# EAGLE board 7-segment_mega (EAGLE 6.2)
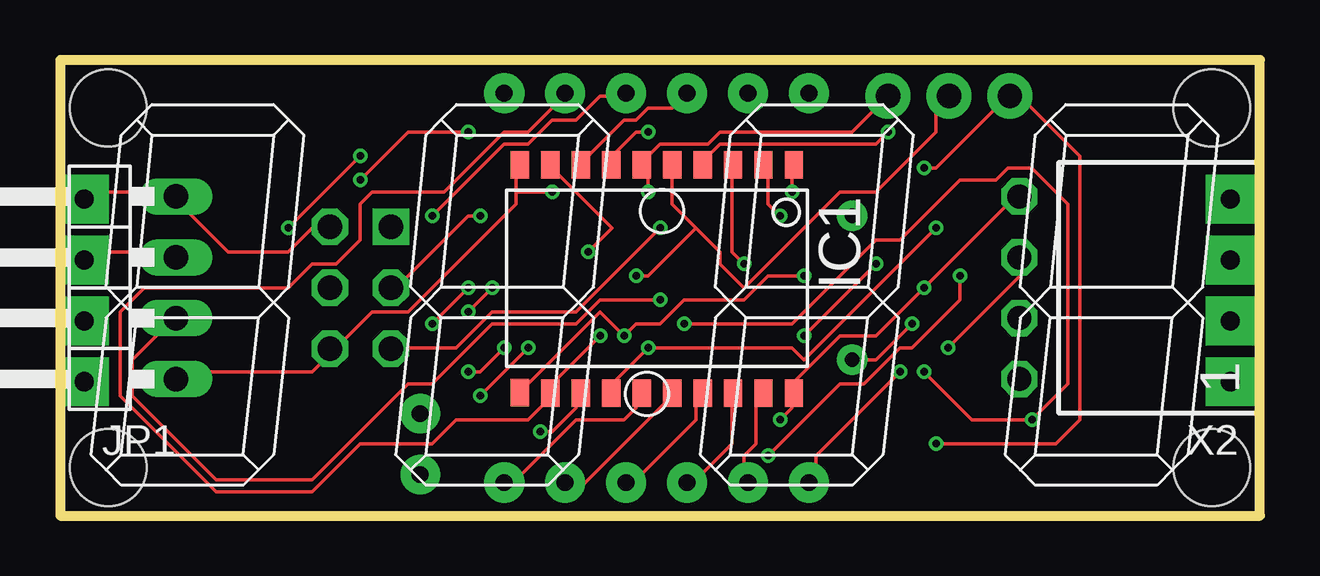
[diagram p0: board, top side]
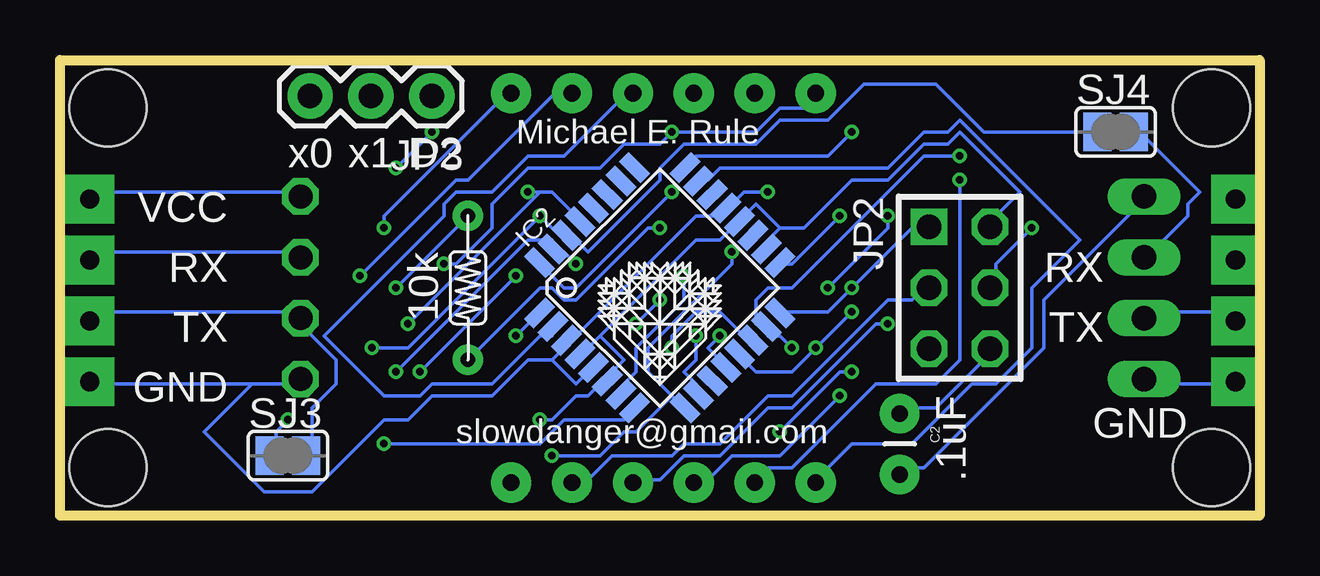
[diagram p1: board, bottom side, seen from below]

Size 50 x 19 mm. Coordinates in mm from the lower left corner, seen from the top.
Outline: 0,0 50,0 50,19 0,19 0,0
Copper layers (1*16): Top 0.035mm / dielectric 1.5mm / Bottom 0.035mm
Design rules: minimum track width 6mil, minimum drill 12mil, track to track 6mil, track to pad 6mil, pad to pad 6mil, via to via 6mil, smd to smd 0mil, copper to edge 10mil, drill to drill 10mil, minimum pad ring 10mil, minimum via ring 6mil, stop-mask expansion 2mil, vias tented up to drill 100mil, thermal gap 10mil
Holes 3.2 mm at 2,17 2,2 48,17 48,2

## Footprints (pad centres in the part's own frame; a part is rotated, then mirrored left to right if it is on the bottom)
CAP-PTH-SMALL = drill 0.7 pad 1.651: 1 0,0; 2 2.54,0
SO20L = smd 0.762 x 1.143: 1 -5.08,-5.131; 2 -3.81,-5.131; 3 -2.54,-5.131; 4 -1.27,-5.131; 5 0,-5.131; 6 1.27,-5.131; 7 2.54,-5.131; 8 3.81,-5.131; 9 5.08,-5.131; 10 6.35,-5.131; 11 6.35,4.369; 12 5.08,4.394; 13 3.81,4.394; 14 2.54,4.394; 15 1.27,4.394; 16 0,4.394; 17 -1.27,4.394; 18 -2.54,4.394; 19 -3.81,4.394; 20 -5.08,4.394
TQFP32-08 = smd 1.27 x 0.559: 1 -4.293,2.8; 2 -4.293,2; 3 -4.293,1.2; 4 -4.293,0.4; 5 -4.293,-0.4; 6 -4.293,-1.2; 7 -4.293,-2; 8 -4.293,-2.8; 17 4.293,-2.8; 18 4.293,-2; 19 4.293,-1.2; 20 4.293,-0.4; 21 4.293,0.4; 22 4.293,1.2; 23 4.293,2; 24 4.293,2.8 | smd 0.559 x 1.27: 9 -2.8,-4.293; 10 -2,-4.293; 11 -1.2,-4.293; 12 -0.4,-4.293; 13 0.4,-4.293; 14 1.2,-4.293; 15 2,-4.293; 16 2.8,-4.293; 25 2.8,4.293; 26 2,4.293; 27 1.2,4.293; 28 0.4,4.293; 29 -0.4,4.293; 30 -1.2,4.293; 31 -2,4.293; 32 -2.8,4.293
1X04/90 = drill 1.016 long: 1 -3.81,-3.81; 2 -1.27,-3.81; 3 1.27,-3.81; 4 3.81,-3.81
AVR-ISP-6 = drill 1.016 square: 1 -2.54,-1.27 | drill 1.016 octagon: 2 -2.54,1.27; 3 0,-1.27; 4 0,1.27; 5 2.54,-1.27; 6 2.54,1.27
1X03 = drill 1.016 pad 1.88: 1 0,0; 2 2.54,0; 3 5.08,0
SJ = smd 1.168 x 1.6: 1 -0.762,0; 2 0.762,0
7SEG_5462BS = drill 0.7 pad 1.676: A0 18.5,17.615; A1 26.12,17.615; A2 28.66,17.615; A3 31.2,1.375; C0 21.04,17.615; C1 23.58,17.615; C2 31.2,17.615; C3 28.66,1.375; C4 18.5,1.375; C5 26.12,1.375; C6 21.04,1.375; C7 23.58,1.375
R-6 = drill 0.6 pad 1.27: P$1 -3,0; P$2 3,0
WIREPAD_SQUARE_1 = drill 0.8 pad 2.032 square: P$1 0,0
SSW-104-02-S-S-RA = drill 1 pad 1.5 octagon: 1 -3.81,1.524; 2 -1.27,1.524; 3 1.27,1.524; 4 3.81,1.524

## Placement (x,y rotation side)
C2  [CAP-PTH-SMALL]  15,4.25 270 bottom
IC1  AT90S2313S  [SO20L]  25.5,9.5 180 top
IC2  MEGA8-AI  [TQFP32-08]  25,9.5 45 bottom
JP1  [1X04/90]  1,9.5 90 top
JP2  AVR-ISP-6  [AVR-ISP-6]  12.5,9.5 270 bottom
JP3  [1X03]  34.5,17.5 180 bottom
SJ3  [SJ]  40.5,2.5 0 bottom
SJ4  [SJ]  6,16 0 bottom
U$1  7-SEGMENT-DISPLAY-5462-BS  [7SEG_5462BS]  0,0 0 top
U$2  R-6  [R-6]  33,9.5 90 bottom
U$3  WIREPAD_SQUARE_1  [WIREPAD_SQUARE_1]  48.76,5.58 0 top
U$4  WIREPAD_SQUARE_1  [WIREPAD_SQUARE_1]  1,8.12 0 top
U$5  WIREPAD_SQUARE_1  [WIREPAD_SQUARE_1]  1,10.66 0 top
U$6  WIREPAD_SQUARE_1  [WIREPAD_SQUARE_1]  1,13.2 0 top
U$7  WIREPAD_SQUARE_1  [WIREPAD_SQUARE_1]  48.76,13.2 0 top
U$8  WIREPAD_SQUARE_1  [WIREPAD_SQUARE_1]  48.76,10.66 0 top
U$9  WIREPAD_SQUARE_1  [WIREPAD_SQUARE_1]  48.76,8.12 0 top
U$10  WIREPAD_SQUARE_1  [WIREPAD_SQUARE_1]  1,5.58 0 top
U$11  [LOGO]  25,8 0 bottom
X2  SSW-104-02-S-S-RA  [SSW-104-02-S-S-RA]  41.5,9.5 90 top

## Library data of the parts
C2 JP3 = SparkFun
IC1 JP2 = avr-5-4.16
IC2 = atmel; MPN: ATMEGA8-16AU; OC_FARNELL: 9171371; OC_NEWARK: 73M8863
JP1 = pinhead
SJ3 SJ4 = jumper
U$1-U$10 = Mrule
U$11 = mrule2
X2 = con-samtec; MPN: SSW-104-02-S-S-RA; OC_FARNELL: unknown; OC_NEWARK: 11P9385

## Nets
GND: C2.1 IC1.10 IC2.3 IC2.5 IC2.21 JP1.1 JP2.6 U$3.P$1 U$10.P$1 X2.1
N$1: IC1.14 IC2.14 U$1.C2
N$2: IC1.17 IC2.15 JP2.4 U$1.C7
N$4: IC1.18 IC2.16 JP2.1 U$1.C5
N$5: IC1.19 IC2.17 JP2.3 U$1.C3
N$6: IC1.11 IC2.10 U$1.A3
N$7: IC1.7 IC2.1 U$1.A0
N$8: IC1.12 IC2.12 U$1.C0
N$10: IC1.8 IC2.2 U$1.A1
N$11: IC1.9 IC2.9 U$1.A2
N$12: IC1.13 IC2.13 U$1.C1
N$15: SJ3.2 U$9.P$1 X2.2
N$16: JP1.3 SJ4.2 U$5.P$1
N$17: IC1.2 IC2.30 SJ4.1 U$8.P$1 X2.3
N$18: IC1.1 IC2.29 JP2.5 U$2.P$1
N$19: IC1.3 IC2.31 JP1.2 SJ3.1 U$4.P$1
N$22: IC1.15 IC2.23 U$1.C4
N$23: IC1.16 IC2.24 U$1.C6
PD2: IC1.6 IC2.32 JP3.1
VCC: C2.2 IC1.20 IC2.4 IC2.6 IC2.18 IC2.20 JP1.4 JP2.2 U$2.P$2 U$6.P$1 U$7.P$1 X2.4
XTAL0: IC1.4 IC2.8 JP3.3
XTAL1: IC1.5 IC2.7 JP3.2

## Tracks (layer width: path | path; a pad name or v marks a point on that pad's centre or on a via)
GND  (via drill 0.3)
  Top 0.152: 19,13.5 19,13 14.5,8.5 13,8.5 11.5,7 JP2.6 11,6.5 10.5,6 5,6 JP1.1 | 19,13.5 19,14.5 IC1.10 | v20.5,13.5 19,13.5
  Bottom 0.152: JP1.1 4.5,5.5 1,5.5 U$10.P$1 | C2.1 15,4.5 13.5,4.5 11.5,6.5 JP2.6 | 27.5,6.5 IC2.5 28,6 28.5,5.5 29.5,6.5 | 29.5,6.5 29,7 IC2.3 | IC2.3 28.5,7.5 23.5,12.5 22.5,12.5 IC2.21 22,13 21.5,13.5 v20.5,13.5 | 29,7.5 IC2.3 | 42,5.5 48.5,5.5 U$3.P$1 | 42,5.5 40,5.5 X2.1 | 29.5,6.5 30.5,6.5 32,5 34.5,5 35.5,4 36.5,4 39.5,1 41.5,1 44,3.5 42,5.5
N$1  (via drill 0.3)
  Top 0.152: IC1.14 23,5.5 v24.5,7 30.5,7 31,6.5 v36.5,12
  Bottom 0.152: v24.5,7 24.5,7.5 23.5,8.5 22.5,8.5 21.5,7.5 IC2.14 | v36.5,12 36.5,12.5 31.5,17.5 U$1.C2
N$2  (via drill 0.3)
  Top 0.152: IC1.17 26.5,5 26.5,4 24,1.5 U$1.C7 | v17.5,5 v19.5,7 | v12.5,15 v9.5,12
  Bottom 0.152: v19.5,7 20,7.5 20.5,7.5 IC2.15 21,8 21,9 20.5,9.5 19.5,9.5 14,15 v12.5,15 | v17.5,5 20,2.5 22,2.5 23.5,1 U$1.C7 | v9.5,12 11,10.5 11,9.5 JP2.4
N$4  (via drill 0.3)
  Top 0.152: IC1.18 28,5 28,3 26.5,1.5 U$1.C5 | v17,9.5 v15.5,8
  Bottom 0.152: IC2.16 20,8.5 18,8.5 v17,9.5 14,12.5 JP2.1 | v15.5,8 16,8 19.5,4.5 20.5,4.5 22.5,2.5 24,2.5 25,1.5 26,1.5 U$1.C5
N$5  (via drill 0.3)
  Top 0.152: IC1.19 29,5 29,3 28.5,2.5 28.5,1.5 U$1.C3 | v17.5,12.5 17,12.5 14,9.5 JP2.3
  Bottom 0.152: v17.5,12.5 19.5,10.5 20,10.5 IC2.17 | U$1.C3 28.5,1.5 28,1.5 27,2.5 24.5,2.5 24,3 22.5,3 20.5,5 19.5,5 15.5,9 14.5,9 14,9.5 JP2.3
N$6  (via drill 0.3)
  Top 0.152: IC1.11 19.5,5.5 22.5,8.5 v23.5,7.5 24,8 25,8 26,9 28.5,9 29.5,10 v31,10 | v35,6 31.5,2.5 31.5,1.5 U$1.A3
  Bottom 0.152: v23.5,7.5 23.5,6.5 24,6 23.5,5.5 IC2.10 23.5,5 | v31,10 v35,6
N$7  (via drill 0.3)
  Top 0.152: v24.5,16 24,16 23,15 IC1.7 | v34,10.5 v31,7.5
  Bottom 0.152: U$1.A0 18.5,17.5 19,17 20,17 21,16 v24.5,16 25,15.5 26.5,15.5 27.5,14.5 30.5,14.5 32,13 32,12 33.5,10.5 v34,10.5 | v31,7.5 30,8.5 IC2.1
N$8  (via drill 0.3)
  Top 0.152: v22.5,7.5 20.5,5.5 IC1.12 20.5,5 19.5,4 16.5,4 15.5,3 12.5,3 10.5,1 6.5,1 2.5,5 2.5,8.5 3.5,9.5 9.5,9.5 10.5,10.5 11.5,10.5 12.5,11.5 12.5,13 13,13.5 16,13.5 18.5,16 19.5,16 21,17.5 U$1.C0
  Bottom 0.152: v22.5,7.5 23,7 22.5,6.5 IC2.12
N$10
  Top 0.152: IC1.8 22,15 23.5,16.5 24,16.5 24.5,17 25.5,17 26,17.5 U$1.A1
  Bottom 0.152: 29.5,8 IC2.2 29.5,7.5 30,7.5 32,5.5 34.5,5.5 35,5 36.5,5 39,7.5 34,12.5 34,13 33.5,13.5 32,13.5 30.5,15 29,15 26.5,17.5 U$1.A1
N$11  (via drill 0.3)
  Top 0.152: v22,11 23,12 20.5,14.5 IC1.9 | v37.5,10 37.5,9 35.5,7 35,7 33.5,5.5 32.5,5.5 v29.5,2.5
  Bottom 0.152: v22,11 22,10.5 25.5,7 25.5,6 24.5,5 | 24.5,5 24,4.5 IC2.9 | v37.5,10 33.5,14 33,14 29.5,17.5 29,17.5 U$1.A2 | v29.5,2.5 27.5,2.5 26.5,3.5 26,3.5 24.5,5
N$12  (via drill 0.3)
  Top 0.152: v20,3.5 20.5,3.5 21.5,4.5 21.5,5 IC1.13 | v17,6 17.5,6 v18.5,7 | v15.5,12.5 18.5,15.5 19.5,15.5 20.5,16.5 21.5,16.5 22.5,17.5 23.5,17.5 U$1.C1 | v17,8.5 v18,9.5
  Bottom 0.152: v20,3.5 17.5,6 v17,6 | 22,7 IC2.13 21.5,6.5 21,6 19.5,6 v18.5,7 v17,8.5 | v15.5,12.5 15.5,12 v18,9.5
N$15
  Bottom 0.152: SJ3.2 39.5,2.5 39.5,4.5 38.5,5.5 38.5,6.5 40,8 X2.2 40,8.5 48.5,8.5 U$9.P$1
N$16
  Top 0.152: U$5.P$1 1,11 4.5,11 JP1.3
  Bottom 0.152: SJ4.2 5,16 2.5,13.5 3,13 3,12.5 4.5,11 JP1.3
N$17  (via drill 0.3)
  Top 0.152: v30,12.5 29.5,13 29.5,14.5 IC1.2 | v37,7 40,10 40,10.5 X2.3
  Bottom 0.152: X2.3 40,11 48.5,11 U$8.P$1 | SJ4.1 11.5,16 13.5,18 16.5,18 18,16.5 20,16.5 21,15.5 24,15.5 25,14.5 25,14 28,11 28.5,11.5 IC2.30 29,11.5 v30,12.5 35.5,7 v37,7
N$18  (via drill 0.3)
  Top 0.152: v30.5,13.5 30.5,14.5 IC1.1 | U$2.P$1 34,6.5 v35.5,8 | v25,12 21.5,8.5 18,8.5 16.5,7 14,7 JP2.5
  Bottom 0.152: 30,13.5 29.5,13.5 28.5,12.5 IC2.29 | 30,13.5 v30.5,13.5 | 30,13.5 v35.5,8 | v25,12 25.5,12 28.5,9 29,9 29.5,9.5 30,9.5 U$2.P$1
N$19  (via drill 0.3)
  Top 0.152: v28.5,10.5 28,11 28,14.5 IC1.3 | v36,6 38,4 v40.5,4 42,5.5 42,13 40.5,14.5 39.5,14.5 39,14 37.5,14 35,11.5 34,11.5 30.5,8 v26,8 | v25,9 22.5,9 21.5,8 18,8 15.5,5.5 14.5,5.5 10.5,1.5 6.5,1.5 3,5 3,6.5 4.5,8 JP1.2
  Bottom 0.152: JP1.2 4.5,8.5 1,8.5 U$4.P$1 | v28.5,10.5 29,11 IC2.31 29.5,11.5 30.5,11.5 v36,6 | v40.5,4 41,3.5 41,2.5 SJ3.1 | v26,8 v25,9
N$22
  Top 0.152: IC1.15 24,5 24,4.5 23.5,4 21.5,4 18.5,1 U$1.C4
  Bottom 0.152: IC2.23 23,14 22.5,14.5 15.5,14.5 14,16 13,16 12.5,16.5 7.5,11.5 9.5,9.5 9.5,7 11,5.5 12,5.5 14.5,3 17,3 18.5,1.5 U$1.C4
N$23  (via drill 0.3)
  Top 0.152: IC1.16 25.5,5 21.5,1 U$1.C6 | v17,16 14.5,16 v12.5,14
  Bottom 0.152: v17,16 18,15 23.5,15 24,14.5 IC2.24 | v12.5,14 12.5,6.5 13.5,5.5 16,5.5 19.5,2 20.5,2 21,1.5 U$1.C6
PD2  (via drill 0.3)
  Top 0.152: JP3.1 33,16 27.5,16 27,15.5 25,15.5 24.5,15 IC1.6 24.5,14.5 v24.5,13.5
  Bottom 0.152: v24.5,13.5 28.5,9.5 29,9.5 30,10.5 IC2.32
VCC  (via drill 0.3)
  Top 0.152: X2.4 39.5,13 v36,9.5 34,7.5 32.5,7.5 30.5,5.5 IC1.20 30.5,5 30.5,4.5 v30,4 | U$6.P$1 1,13.5 4.5,13.5 JP1.4 5,13 7,11 9.5,11 10.5,12 11,12 JP2.2
  Bottom 0.152: v36,9.5 U$2.P$2 | U$7.P$1 48.5,13.5 40,13.5 X2.4 | 20,12 20.5,11.5 IC2.18 | 20,12 21,13 21.5,12.5 IC2.20 22,12 22.5,11.5 23.5,11.5 27.5,7.5 | 27.5,7.5 26.5,6.5 27,6 IC2.6 27.5,5.5 28,5 28.5,5 29.5,4 v30,4 | 27.5,7.5 28,7 IC2.4 | C2.2 15,2 14,2 9,7 9,9 5,13 JP1.4 | 20,12 19,12 17,14 15.5,14 14,15.5 13,15.5 12.5,16 10,13.5 11,12.5 JP2.2
XTAL0  (via drill 0.3)
  Top 0.152: v34.5,16 34,15.5 27.5,15.5 27,15 IC1.4 | v36,14.5 36.5,14.5 39.5,17.5 JP3.3 40,17.5 42.5,15 42.5,4 41.5,3 v36.5,3
  Bottom 0.152: v36,14.5 v34.5,16 | v36.5,3 30,3 29,4 26.5,4 26,4.5 IC2.8
XTAL1  (via drill 0.3)
  Top 0.152: IC1.5 25.5,13 26.5,12 | 26.5,12 27.5,11 27.5,10.5 28.5,9.5 32.5,13.5 34,13.5 36.5,16 36.5,17 37,17.5 JP3.2 | v24,10 24.5,10 26.5,12
  Bottom 0.152: v24,10 24,9 26,7 26,6 26.5,5.5 IC2.7

## Text on the board
bPlace: Michael E. Rule | D2 | x1 | x0 | VCC | RX | 10k | RX | TX | TX | GND | .1uF | GND | slowdanger@gmail.com